# Altium PCB BodyCaINv0.1.PcbDoc
Units mil, origin at the board's own origin, x right, y up, seen from the top; angles counter-clockwise.
Board outline 1160 x 1160 mil, 2 copper layers (Top Layer, Bottom Layer); 28 components, 16 nets, 70 pads, 24 vias.
Unrouted connection lines stored in the file: 54.
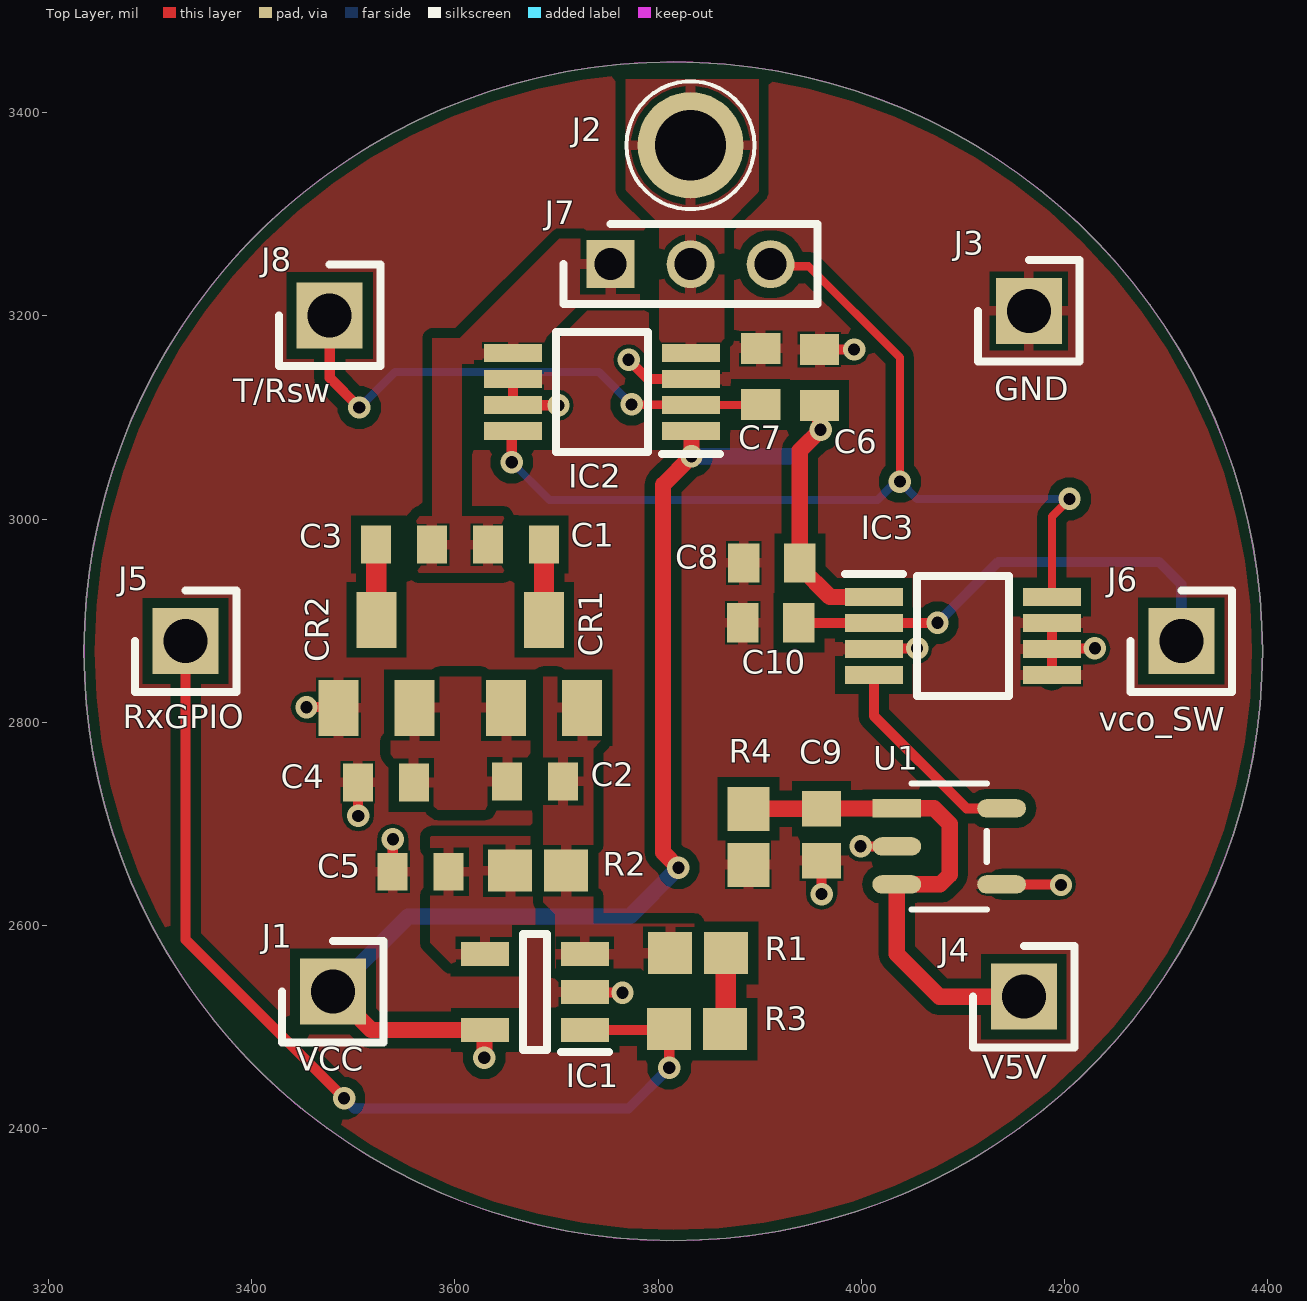
[diagram p0: Top Layer view]
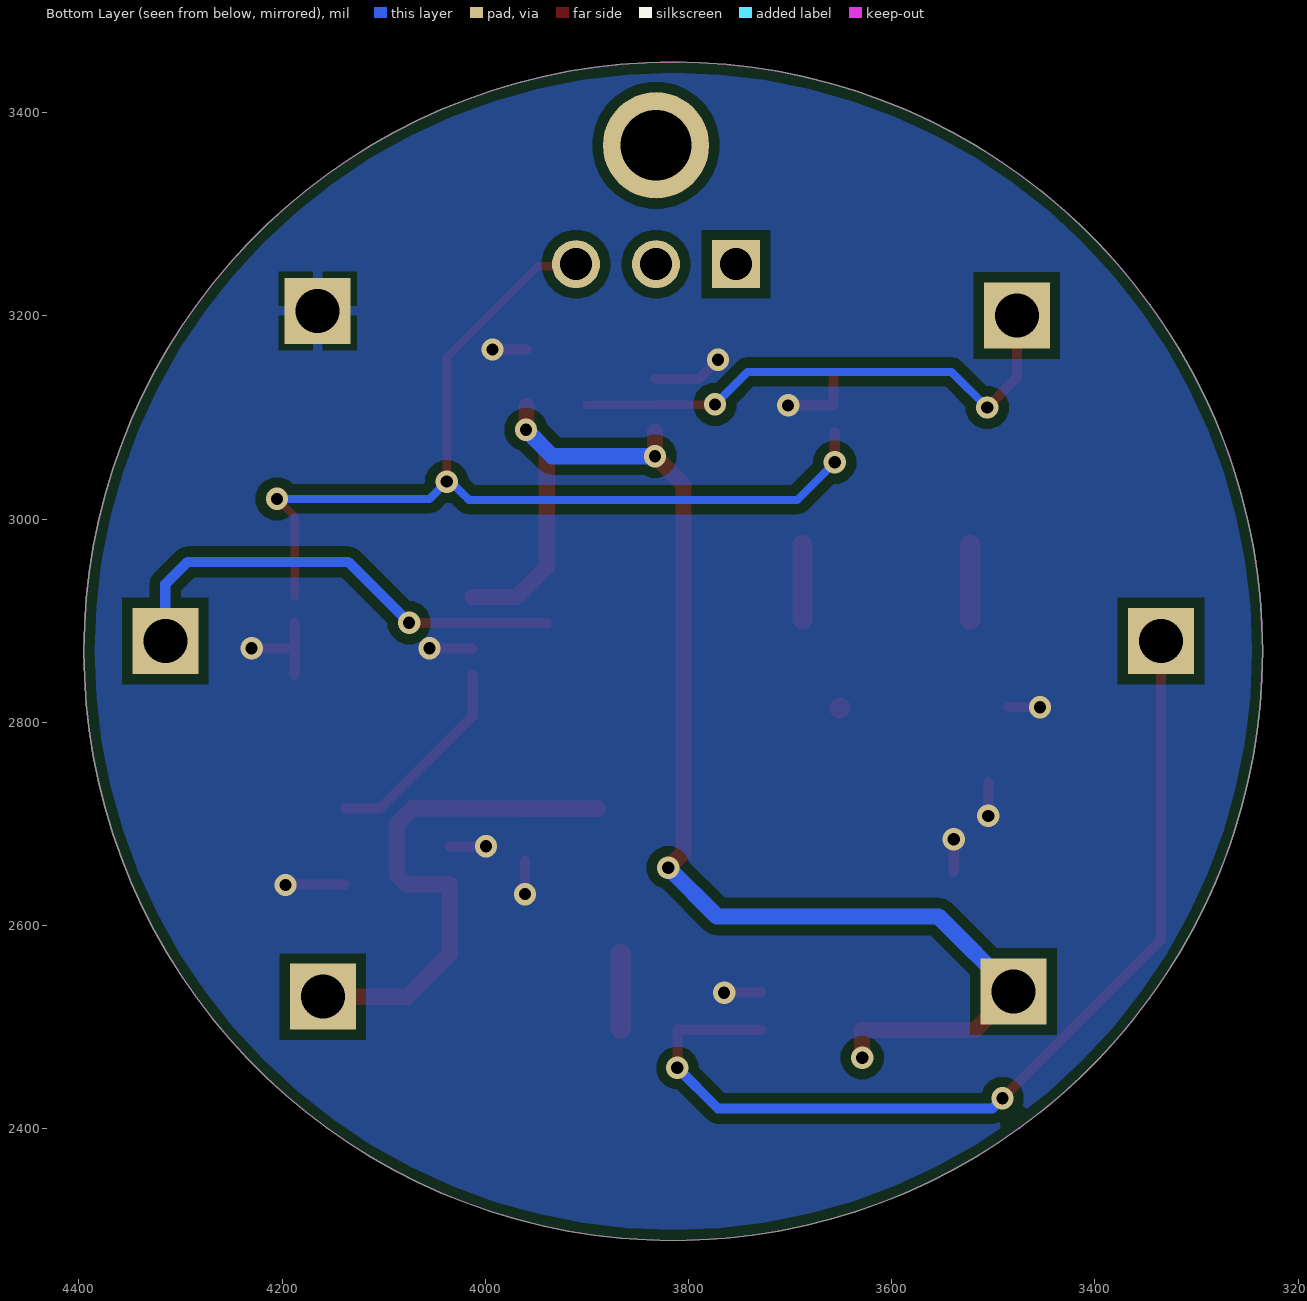
[diagram p1: Bottom Layer view, seen from below]
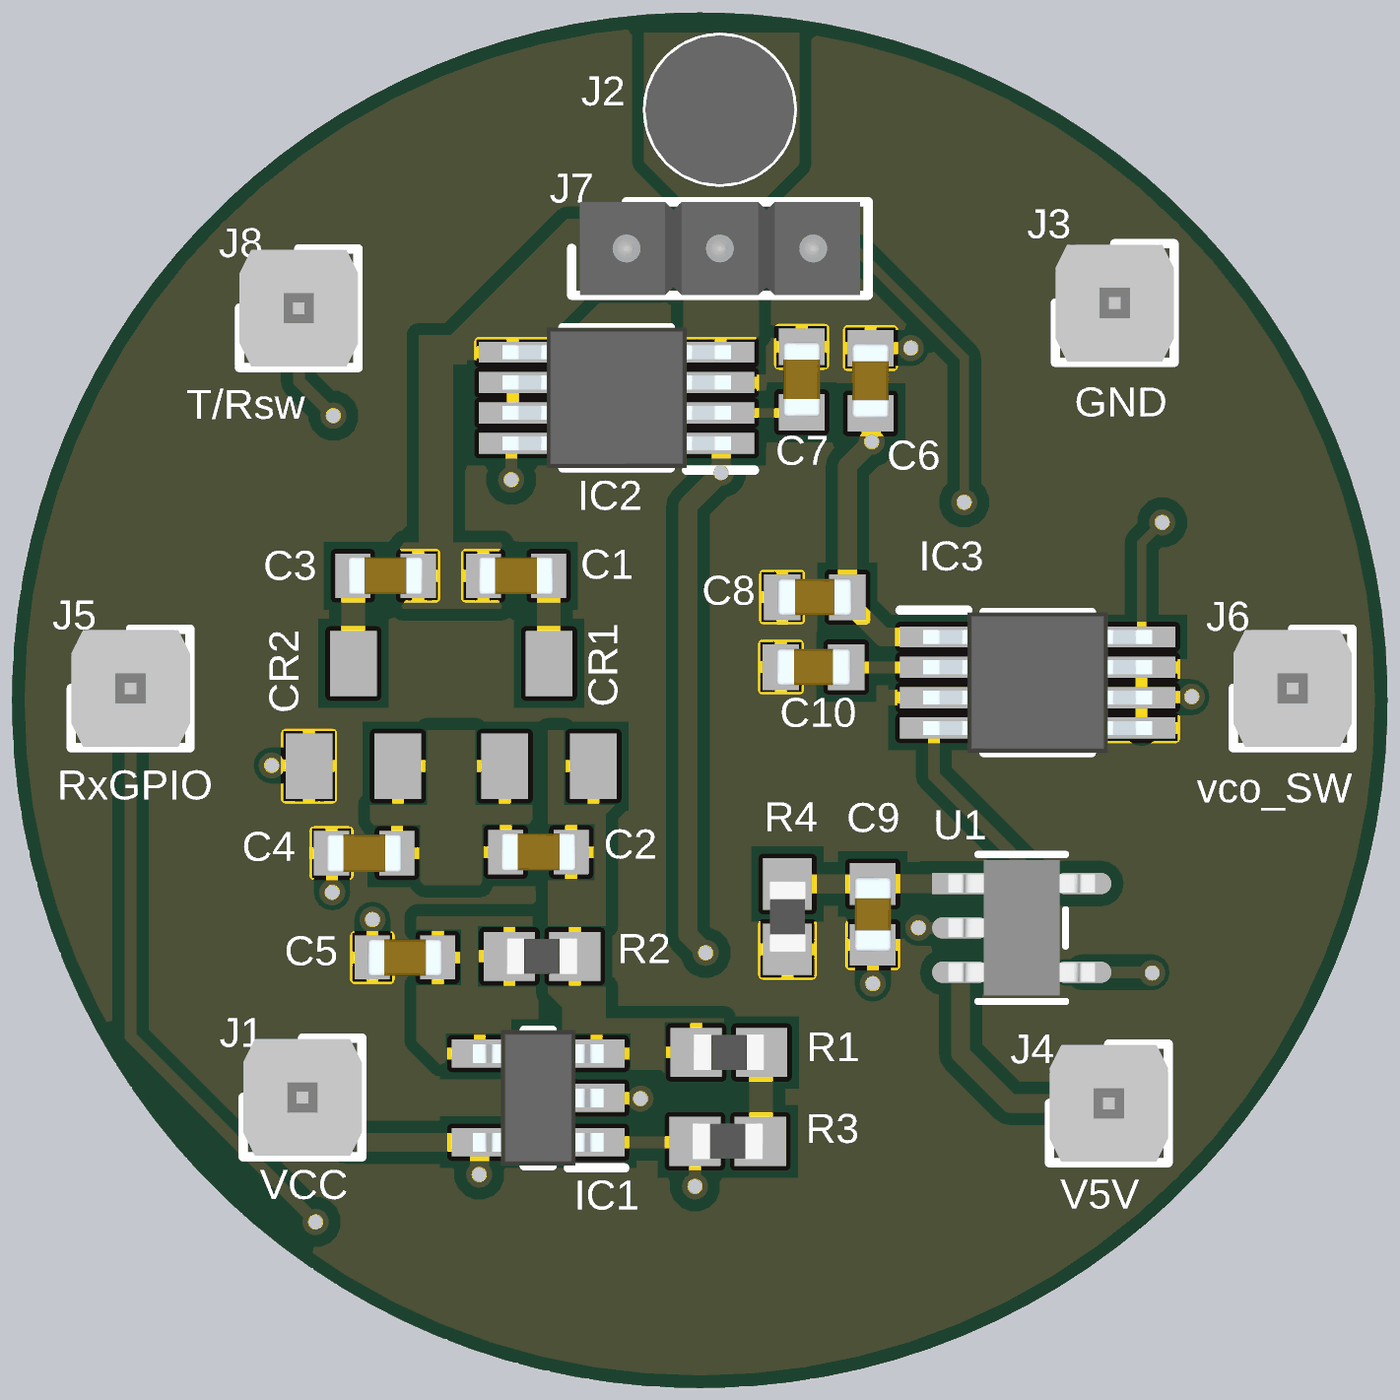
[diagram p2: 3D render of the assembled board from above, using the file's embedded part models]

## Layer stack, top to bottom
Top Solder: solder mask 0.4, Solder Resist, Dk 3.5
Top Layer: signal copper 1.4
Dielectric 1: dielectric 12.6, FR-4, Dk 4.8
Bottom Layer: signal copper 1.4
Bottom Solder: solder mask 0.4, Solder Resist, Dk 3.5

## Board outline
3235,2870 ccw(c3815,2870) 3815,2290 ccw(c3815,2870) 4395,2870 ccw(c3815,2870) 3815,3450 ccw(c3815,2870)

## Design rules (kind name [scope] priority, off if disabled: settings)
Clearance [All] p1: gap=6 ignorepadtopadclearanceinfootprint=FALSE except(8: Arc-Arc Arc-Track Track-Track; 10: Arc-Fill Arc-Poly Arc-Region Track-Fill Track-Poly Track-Region SMDPad-Fill SMDPad-Poly SMDPad-Region THPad-Fill THPad-Poly THPad-Region Via-Fill Via-Poly Via-Region Fill-Fill Fill-Poly Fill-Region Poly-Poly Poly-Region Region-Region)
PlaneClearance [All] p1: clearance=8
PolygonConnect [All] p1: thpad.connectstyle=Relief thpad.reliefconductorwidth=10 thpad.reliefentries=4 thpad.polygonreliefangle="90 Angle" thpad.airgapwidth=6 smdpad.connectstyle=Relief smdpad.reliefconductorwidth=10 smdpad.reliefentries=4 smdpad.polygonreliefangle="90 Angle" smdpad.airgapwidth=2 via.connectstyle=Direct via.reliefconductorwidth=10 via.reliefentries=4 via.polygonreliefangle="90 Angle" via.airgapwidth=10
RoutingVias [All] p1: holewidth=12 width=22 viastyle="Through Hole" minholewidth=12 minwidth=22 maxholewidth=20 maxwidth=32
SilkToSilkClearance [All] p1: silktosilkclearance=2
SilkToSolderMaskClearance [IsPad] p1: minsilkscreentomaskgap=2 clearancetoexposedcopper=TRUE
SolderMaskExpansion [All] p1: expansion=4 istentingtop=FALSE
SupplyNets "Schematic Supply Nets" [InNet('GND')] p1: voltage=0.000
Width [All] p1: maxlimit=20 minlimit=6 preferedwidth=8
27 further rules are at their usual default settings.

## Components (designator, comment, footprint, x,y, rotation, side; value= is the part's Value field where it differs from the comment)
C1 "4.7 pF" CAPC1608X73N 3660,2975 r0 top
C2 "4.7 pF" CAPC1608X73N 3679,2742 r0 top
C3 "4.7 pF" CAPC1608X73N 3550,2975 r180 top
C4 "4.7 pF" CAPC1608X73N 3532,2741 r0 top
C5 "100nF" CAPC1608X90N 3566.44,2653 r0 top
C6 "100pF" CAPC1608X97N 3959,3139.44 r270 top
C7 "100pF" CAPC1608X97N 3901,3140.56 r270 top
C8 "100pF" CAPC1608X97N 3912,2957 r0 top
C9 "0.1uF" CAPC1608X100N 3961,2689.41 r90 top
C10 "100pF" CAPC1608X97N 3911,2898 r0 top
CR1 "SMS7621-005LF" SOT23 3688,2857.69 r0 top
CR2 "SMS7621-005LF" SOT23 3522.88,2857.69 r0 top
IC1 "TLV7031DBVR" SOT95P280X145-5N 3678.79,2534.6 r180 top
IC2 "ADG918BRMZ-REEL7" SOP65P490X110-8N 3744.9,3125.1 r180 top
IC3 "ADG902BRMZ" SOP65P490X110-8N 4100,2885 r0 top
J1 "90120-0761" HDRV1W90P0X254_1X1_232X249X560P 3480,2535 r0 top
J2 "1508-2" 15082 3832,3368 r0 top
J3 "90120-0761" HDRV1W90P0X254_1X1_232X249X560P 4165,3205 r0 top
J4 "90120-0761" HDRV1W90P0X254_1X1_232X249X560P 4160,2530 r0 top
J5 "90120-0761" HDRV1W90P0X254_1X1_232X249X560P 3335,2880 r0 top
J6 "90120-0761" HDRV1W90P0X254_1X1_232X249X560P 4315,2880 r0 top
J7 "M22-2510305" HDRV3W60P0X200_1X3_600X200X525P 3753.26,3251 r0 top
J8 "90120-0761" HDRV1W90P0X254_1X1_232X249X560P 3476.85,3200.63 r0 top
R1 "TBD" RESC1508X46N 3839.56,2573 r180 top
R2 "TBD" RESC1508X46N 3682,2654 r180 top
R3 "TBD" RESC1508X46N 3838.56,2498 r0 top
R4 "TBD" RESC1508X46N 3889,2687.44 r90 top
U1 "LTC6900IS5TRMPBF" S_5_ADI 4086.57,2678 r0 top

## Footprints (in the part's own frame and the unit in brackets; to place one, negate y for a bottom-side part, rotate by r counter-clockwise, add the part's x,y. Pads: shape width x height; smd on the part's side, far side on the other; paste and mask are expansions set on the pad)
15082 [mm]
  round 2.655 hole 1.77: 1(0,0)
  silkscreen extent -1.6,-1.6 1.6,1.6, body extent -1.6,-1.59 1.6,1.59, height 2.46
CAPC1608X73N [mm]
  rect 0.75x0.95 smd: 1(-0.7,0) 2(0.7,0)
  body extent -0.8,-0.41 0.8,0.41, height 0.73
CAPC1608X90N [mm]
  rect 0.75x0.94 smd: 1(-0.7,0) 2(0.7,0)
  body extent -0.8,-0.4 0.8,0.4, height 0.9
CAPC1608X97N [mm]
  rect 0.78x0.98 smd: 1(-0.7,0) 2(0.7,0)
  body extent -0.8,-0.4 0.8,0.4, height 0.97
CAPC1608X100N [mm]
  rect 0.89x0.98 smd: 1(-0.65,0) 2(0.65,0)
  body extent -0.8,-0.4 0.8,0.4, height 1
HDRV1W90P0X254_1X1_232X249X560P [mm]
  rect 1.65x1.65 hole 1.1: 1(0,0)
  silkscreen extent -1.27,-1.27 1.27,1.27, body extent -1.27,-1.25 1.27,1.25, height 5.37
HDRV3W60P0X200_1X3_600X200X525P [mm]
  rect 1.2x1.2 hole 0.8: 1(0,0)
  round 1.2 hole 0.8: 2(2,0) 3(4,0)
  silkscreen extent -1.17,-1 5.18,1, body extent -1,-1 5,1, height 5.25
RESC1508X46N [mm]
  rect 1.1x1.05 smd: 1(-0.7,0) 2(0.7,0)
  body extent -0.76,-0.38 0.76,0.38, height 0.36
S_5_ADI [mil]
  rect 48x18 smd paste+0 mask+0: 1(-51.57,37.4)
  oval 48x18 smd paste+0 mask+0: 2(-51.57,0) 3(-51.57,-37.4) 4(51.57,-37.4) 5(51.57,37.4)
  silkscreen extent -37,-62 37,62, body extent -62,-57 62,57, height 39
SOP65P490X110-8N [mm]
  rect 1.45x0.45 smd: 1(-2.225,0.975) 2(-2.225,0.325) 3(-2.225,-0.325) 4(-2.225,-0.975) 5(2.225,-0.975) 6(2.225,-0.325) 7(2.225,0.325) 8(2.225,0.975)
  silkscreen extent -2.95,-1.5 1.15,1.55, body extent -2.45,-1.5 2.45,1.5, height 1.1
SOT23 [mm]
  rect 1x1.4 smd: 1(-0.95,-1.1) 2(0.95,-1.1) 3(0,1.1)
SOT95P280X145-5N [mm]
  rect 1.2x0.6 smd: 1(-1.25,0.95) 2(-1.25,0) 3(-1.25,-0.95) 4(1.25,-0.95) 5(1.25,0.95)
  silkscreen extent -1.85,-1.45 0.3,1.5, body extent -1.4,-1.45 1.4,1.45, height 1.45

## Part data
C1 C2 C3 C4: library part 06035J4R7BBSTR, "Capacitor 06035J4R7BBSTR", Manufacturer_Name="Kyocera AVX", Mouser Part Number=581-06035J4R7BBS, Arrow Part Number=06035J4R7BBSTR, Arrow Price/Stock=https://www.arrow.com/en/products/06035j4r7bbstr/avx, Datasheet Link=https://datasheets.kyocera-avx.com/Accu-P.pdf, Height=0.73mm, Manufacturer_Part_Number=06035J4R7BBSTR, Mouser Price/Stock=https://www.mouser.com/Search/Refine.aspx?Keyword=581-06035J4R7BBS
C5: library part GCM188R71H103KA37J, "Capacitor GCM188R71H103KA37J", Manufacturer_Name="Murata Electronics", Mouser Part Number=81-GCM188R71H103KA7J, Arrow Part Number=GCM188R71H103KA37J, Arrow Price/Stock=https://www.arrow.com/en/products/gcm188r71h103ka37j/murata-manufacturing?region=nac, Datasheet Link=https://psearch.en.murata.com/capacitor/product/GCM188R71H103KA37%23.pdf, Height=0.9mm, Manufacturer_Part_Number=GCM188R71H103KA37J, Mouser Price/Stock=https://www.mouser.co.uk/ProductDetail/Murata-Electronics/GCM188R71H103KA37J?qs=N3Kl9KD794T3%2FxlXdF0Axg%3D%3D
C6 C7 C8 C10: library part VJ0603A101FXAAC, "Capacitor VJ0603A101FXAAC", Manufacturer_Name=Vishay, Mouser Part Number=77-VJ0603A101FXAAC, Arrow Part Number=VJ0603A101FXAAC, Arrow Price/Stock=https://www.arrow.com/en/products/vj0603a101fxaac/vishay?region=nac, Datasheet Link=http://www.vishay.com/docs/45226/vj31xrohsautomlcc.pdf, Height=0.97mm, Manufacturer_Part_Number=VJ0603A101FXAAC, Mouser Price/Stock=https://www.mouser.co.uk/ProductDetail/Vishay-Vitramon/VJ0603A101FXAAC?qs=S65kAjFE%2FJCNoIVW2knBSg%3D%3D
C9: library part C0603X104K1RACTU, "CapacitorC0603X104K1RACTU", Manufacturer_Name=KEMET, Datasheet Link=https://search.kemet.com/component-documentation/download/specsheet/C0603X104K1RACTU, Height=1mm, Manufacturer_Part_Number=C0603X104K1RACTU
CR1 CR2: "No Description Available", Mfr_Name=Skyworks, RefDes=RefDes, Type=Type
IC1: "Integrated Circuit", Manufacturer_Name="Texas Instruments", Mouser Part Number=595-TLV7031DBVR, Arrow Part Number=TLV7031DBVR, Arrow Price/Stock=https://www.arrow.com/en/products/tlv7031dbvr/texas-instruments?region=nac, Datasheet Link=http://www.ti.com/lit/gpn/TLV7031, Height=1.45mm, Manufacturer_Part_Number=TLV7031DBVR, Mouser Price/Stock=https://www.mouser.co.uk/ProductDetail/Texas-Instruments/TLV7031DBVR?qs=EBDBlbfErPzxbC0zg598sw%3D%3D
IC2: "Integrated Circuit", Manufacturer_Name="Analog Devices", Mouser Part Number=584-ADG918BRMZ-R7, Arrow Part Number=ADG918BRMZ-REEL7, Arrow Price/Stock=https://www.arrow.com/en/products/adg918brmz-reel7/analog-devices, Datasheet Link=https://www.analog.com/media/en/technical-documentation/data-sheets/ADG918_919.pdf, Height=1.1mm, Manufacturer_Part_Number=ADG918BRMZ-REEL7, Mouser Price/Stock=https://www.mouser.co.uk/ProductDetail/Analog-Devices/ADG918BRMZ-REEL7?qs=BpaRKvA4VqEay0U7Dc17vw%3D%3D
IC3: "Integrated Circuit", Manufacturer_Name="Analog Devices", Mouser Part Number=584-ADG902BRMZ, Arrow Part Number=ADG902BRMZ, Arrow Price/Stock=https://www.arrow.com/en/products/adg902brmz/analog-devices?region=nac, Datasheet Link=https://datasheet.datasheetarchive.com/originals/distributors/Datasheets-SFU1/DSASFU10004819.pdf, Height=1.1mm, Manufacturer_Part_Number=ADG902BRMZ, Mouser Price/Stock=https://www.mouser.co.uk/ProductDetail/Analog-Devices/ADG902BRMZ?qs=BpaRKvA4VqGOESsiE6jGWw%3D%3D
J1 J3 J4 J5 J6 J8: "Connector", Manufacturer_Name=Molex, Mouser Part Number=538-90120-0761, Datasheet Link=https://www.molex.com/pdm_docs/sd/901200761_sd.pdf, Height=5.6mm, Manufacturer_Part_Number=90120-0761, Mouser Price/Stock=https://www.mouser.co.uk/ProductDetail/Molex/90120-0761?qs=PvP5v7Eimsn%2F58TpDaAAow%3D%3D
J2: "Connector", Manufacturer_Name="Keystone Electronics", Mouser Part Number=534-1508-2, Datasheet Link=http://keyelco.com/userAssets/file/M65p142.pdf, Height=2.36mm, Manufacturer_Part_Number=1508-2, Mouser Price/Stock=https://www.mouser.com/Search/Refine.aspx?Keyword=534-1508-2
J7: "Connector", Manufacturer_Name=Harwin, Mouser Part Number=855-M22-2510305, Datasheet Link=https://cdn.harwin.com/pdfs/M22-251.pdf, Height=5.25mm, Manufacturer_Part_Number=M22-2510305, Mouser Price/Stock=https://www.mouser.co.uk/ProductDetail/Harwin/M22-2510305?qs=Z7IUn5gUMVONkEjocUd7kg%3D%3D
R1 R2 R3 R4: library part WSL060300000ZEA9, "Resistor WSL060300000ZEA9", Manufacturer_Name=Vishay, Mouser Part Number=71-WSL060300000ZEA9, Arrow Part Number=WSL060300000ZEA9, Arrow Price/Stock=https://www.arrow.com/en/products/wsl060300000zea9/vishay?region=nac, Datasheet Link=http://www.vishay.com/docs/30192/wsl-9.pdf, Height=0.457mm, Manufacturer_Part_Number=WSL060300000ZEA9, Mouser Price/Stock=https://www.mouser.co.uk/ProductDetail/Vishay-Dale/WSL060300000ZEA9?qs=Q7nJoqLg%252BZgzeflh6I0jJw%3D%3D
U1: "No Description Available", Mfr_Name="Analog Devices Inc", RefDes=RefDes, Type=Type

## Via types
v1: diameter 22, hole 12, Top Layer to Bottom Layer, tented both sides, 22 vias
v2: diameter 22/22 (per signal layer), hole 12, Top Layer to Bottom Layer, tented both sides, 2 vias

## Nets (pads, with @x,y where several pads share a name; then routed paths per layer and width w, separated by ;. In a path a pad name is that pad's centre, name@x,y a point inside that pad or via, vN(x,y) a via of type N, cw(c..) or ccw(c..) an arc to the next point about the centre after c; other vN are vias at no path point)
Antenna: IC2.4 J2.1 J7.2
ComP_Ref: C5.2 IC1.4 R2.2
GND: C4.1 C5.1 C6.1 C7.1 C8.1 C9.1 C10.1 CR2.1 IC1.2 IC2.3 IC2.6 IC2.7 IC3.3 IC3.5 IC3.6 IC3.7 J3.1 R4.1 U1.2 U1.4 | length 567.3
  Top Layer w10: v1(3454,2815) CR2.1@3484.86,2815 ; C4.1@3504.72,2740.72 3504.72,2708.28 v1(3505,2708) ; C5.1 v1@3538.88,2684.88 ; IC2.7@3657.3,3112.1 v1@3701.9,3112.1 ; IC2.7@3657.4,3112.2 IC2.6@3657.4,3137.8 ; IC1.2@3728.3,2534.3 3764.7,2534.3 v1(3765,2534) ; v1(3771,3157) 3790.1,3137.9 IC2.3 ; C6.1 v1(3993,3167) ; v1(3961,2631) C9.1 ; v1@3999.51,2678 U1.2 ; IC3.3@4012.8,2872.6 v1@4054.6,2872.6 ; U1.4 v1@4196.02,2640.6 ; IC3.5 IC3.6 ; IC3.7 IC3.6 ; v1@4229.6,2872.6 4188,2872.6 IC3.6
  other v1: 4196.64,2639.97 3999.38,2678.13 3539,2685 4055,2873 4230,2873 3702,3112
NetC1_2: C1.2 CR1.3 | length 73.6
  Top Layer w20: CR1.3@3687.78,2901.22 C1.2@3687.78,2974.78
NetC2_1: C2.1 C4.2 CR1.1 CR2.2 | length 0.6
  Top Layer w20: CR1.1 CR1.1@3651.02,2813.96
NetC3_2: C3.2 CR2.3 | length 73.4
  Top Layer w20: CR2.3@3522.72,2901.28 C3.2@3522.72,2974.72
NetR1_1: R1.1 R3.2 | length 74
  Top Layer w20: R3.2@3866.62,2498.5 R1.1@3866.62,2572.5
Rx_Analog: C2.2 CR1.2 IC1.3 R1.2 R2.1
Rx_Radio: C1.1 C3.1 IC2.5 J7.1
RxGPIO: IC1.1 J5.1 R3.1 | length 975.5
  Top Layer w10: J5.1 3335,2586 v1(3491,2430) ; IC1.1 R3.1@3810.2,2497.2 ; v1(3811,2460) R3.1
  Bottom Layer w10: v1(3491,2430) 3501,2420 3771,2420 v1(3811,2460)
T/Rsw: C7.2 IC2.2 J8.1 | length 524.1
  Top Layer w8: v1@3774.4,3112.6 IC2.2@3832.2,3112.6 ; IC2.2 C7.2@3900.31,3112.31
  Top Layer w10: J8.1 3476.85,3139.15 v1(3506,3110)
  Bottom Layer w8: v1(3506,3110) 3541,3145 3742,3145 v1(3774,3113)
TxRadio: IC2.8 IC3.8 J7.3 | length 996.4
  Top Layer w8: J7.3@3912.74,3249 3948,3249 4038,3159 v2(4038,3037) ; IC3.8 4187.6,3002.6 v1(4205,3020)
  Top Layer w10: v1(3656,3056) IC2.8@3656,3085.21
  Bottom Layer w8: v1(3656,3056) 3693,3019 4016.04,3019 4020.29,3023.25 4020.46,3023.25 4034.21,3037 v2(4038,3037) 4055,3020 v1(4205,3020)
V5V: C9.2 J4.1 R4.2 U1.1 U1.3 | length 520.9
  Top Layer w16: R4.2 C9.2 ; C9.2@3961.2,2715.2 U1.1@4034.8,2715.2 ; U1.1 4071.6,2715.4 4087,2700 4087,2649.97 4077.63,2640.6 U1.3 4035,2572 4077,2530 J4.1
VCC: C6.2 C8.2 IC1.5 IC2.1 IC3.1 J1.1 | length 1416.2
  Top Layer w12: IC3.1 IC3.1@4012.71,2923.69
  Top Layer w16: J1.1 3517.8,2497.2 IC1.5 ; v1(3629,2470) 3629.29,2470.29 IC1.5@3629.29,2496.91 ; v1(3820,2657) 3805,2672 3805,3034 v2(3833,3062) IC2.1@3833,3086.21 ; C8.2@3939.56,2953.06 3969.24,2923.39 IC3.1 ; C8.2 3939.56,3067.56 v1(3960,3088) 3959.5,3088.5 C6.2@3959.5,3111.38
  Bottom Layer w16: J1.1 3554,2609 3772,2609 v1(3820,2657) ; v2(3833,3062) 3934,3062 v1(3960,3088)
VCO_output: IC3.4 U1.5 | length 203.5
  Top Layer w10: IC3.4 4012.4,2806.6 4103.6,2715.4 U1.5
vco_SW: C10.2 IC3.2 J6.1 | length 466.3
  Top Layer w10: C10.2@3938.76,2897.8 IC3.2 4012.5,2897.9 4074.9,2897.9 v1(4075,2898)
  Bottom Layer w10: v1(4075,2898) 4135,2958 4293,2958 4315,2936 J6.1

## Polygon pours and split planes (outlines as drawn)
GND on Top Layer "GND_L01_P008" (solid, remove dead copper, pour order 8): 4424.5,3463 4424.5,2283 3219.5,2281 3219.5,3463
Antenna on Top Layer "ANTENNA_L01_P004" (solid, pour order 4): 3768,3433 3899,3433 3899,3322 3865,3288 3865,3154 3801,3154 3801,3291 3768,3324
Rx_Radio on Top Layer "RX_RADIO_L01_P007" (solid, pour order 7): 3782,3276.25 3782,3215.25 3726,3215.25 3690,3179.25 3690,3153 3607,3153 3607,3003 3651,3003 3651,2947.25 3561,2947.25 3560,3003 3578,3003 3578,3178 3604.75,3178 3703,3276.25
ComP_Ref on Top Layer "COMP_REF_L01_P006" (solid, pour order 6): 3576,2687 3577,2688 3674,2688 3674,2680 3679,2675 3679,2601 3656,2601 3656,2557 3602,2557 3576,2583
NetC2_1 on Top Layer "NETC2_1_L01_P002" (solid, pour order 2): 3537,2845 3674,2845 3674,2714 3537,2714 3537,2719
Rx_Analog on Top Layer "RX_ANALOG_L01_P000" (solid, remove dead copper, pour order 0): 3748,2845 3748,2786 3736,2774 3736,2602 3836,2602 3836,2551 3790,2551 3783,2558 3699,2558 3699,2611 3687,2623 3687,2845
GND on Bottom Layer "GND_L02_P010" (solid, remove dead copper, pour order 10): 4427,3458 4427,2278 3222,2276 3222,3458

## Keep-outs
Keep-Out Layer:
  circle w1: c3815,2870 r580

## Silkscreen, mask and mechanical layers (free items; w line width, h text height)
Top Overlay:
  text "GND" at 4131,3109.44 h40
  text "T/Rsw" at 3382,3107.44 h40
  text "RxGPIO" at 3273,2786.44 h40
  text "vco_SW" at 4234,2784 h40
  text "VCC" at 3444.04,2449.44 h40
  text "V5V" at 4119.04,2441.44 h40

## Dimensions
3815,3450 to 3815,2290 on Mechanical 3
3235,2870 to 4395,2870 on Mechanical 3